# Altium PCB 婴儿监测系统.PcbDoc
Units mil, origin at the board's own origin, x right, y up, seen from the top; angles counter-clockwise.
Board outline 1968.5 x 3740.16 mil, 2 copper layers (Top Layer, Bottom Layer); 20 components, 42 nets, 149 pads, 0 vias.
Unrouted connection lines stored in the file: 2.
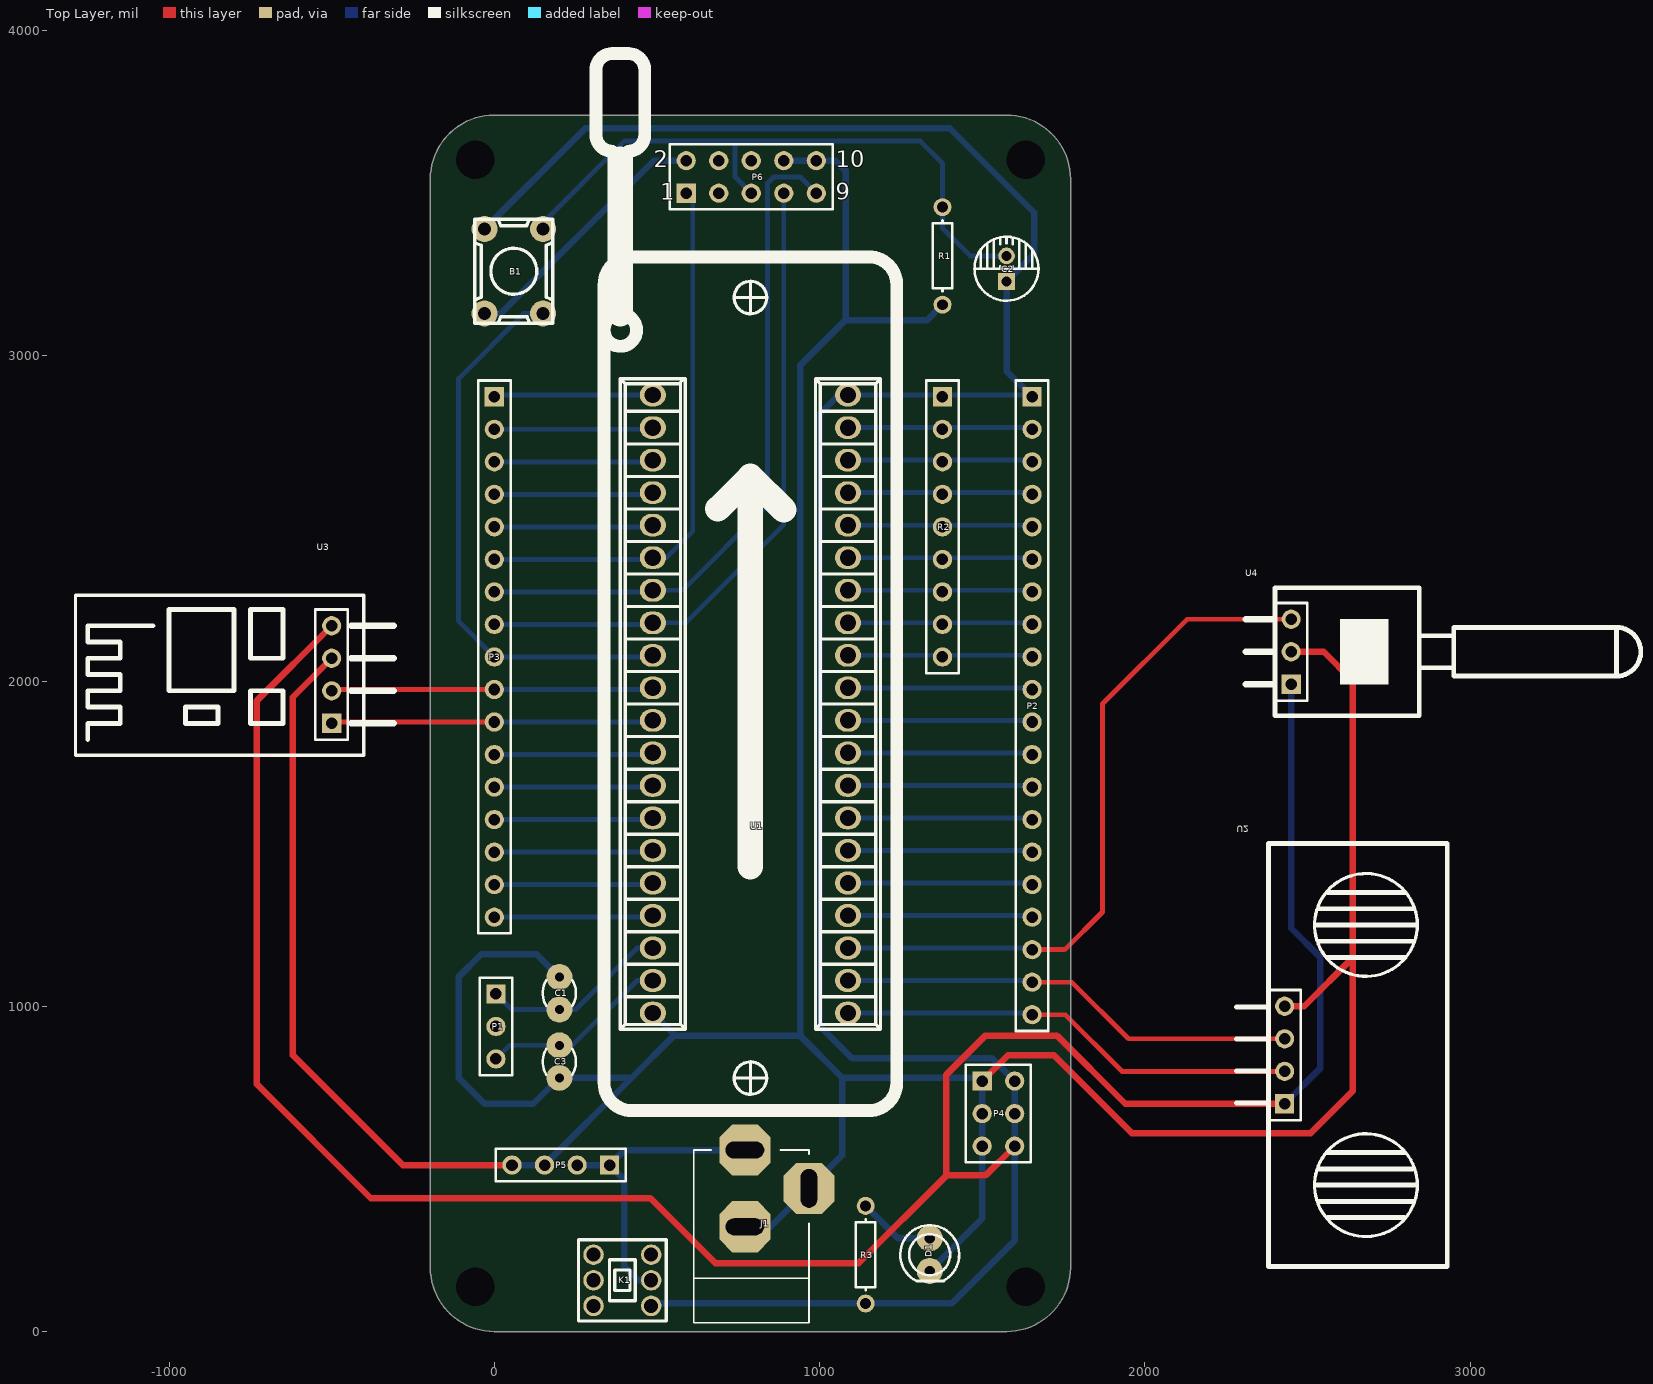
[diagram p0: Top Layer view]
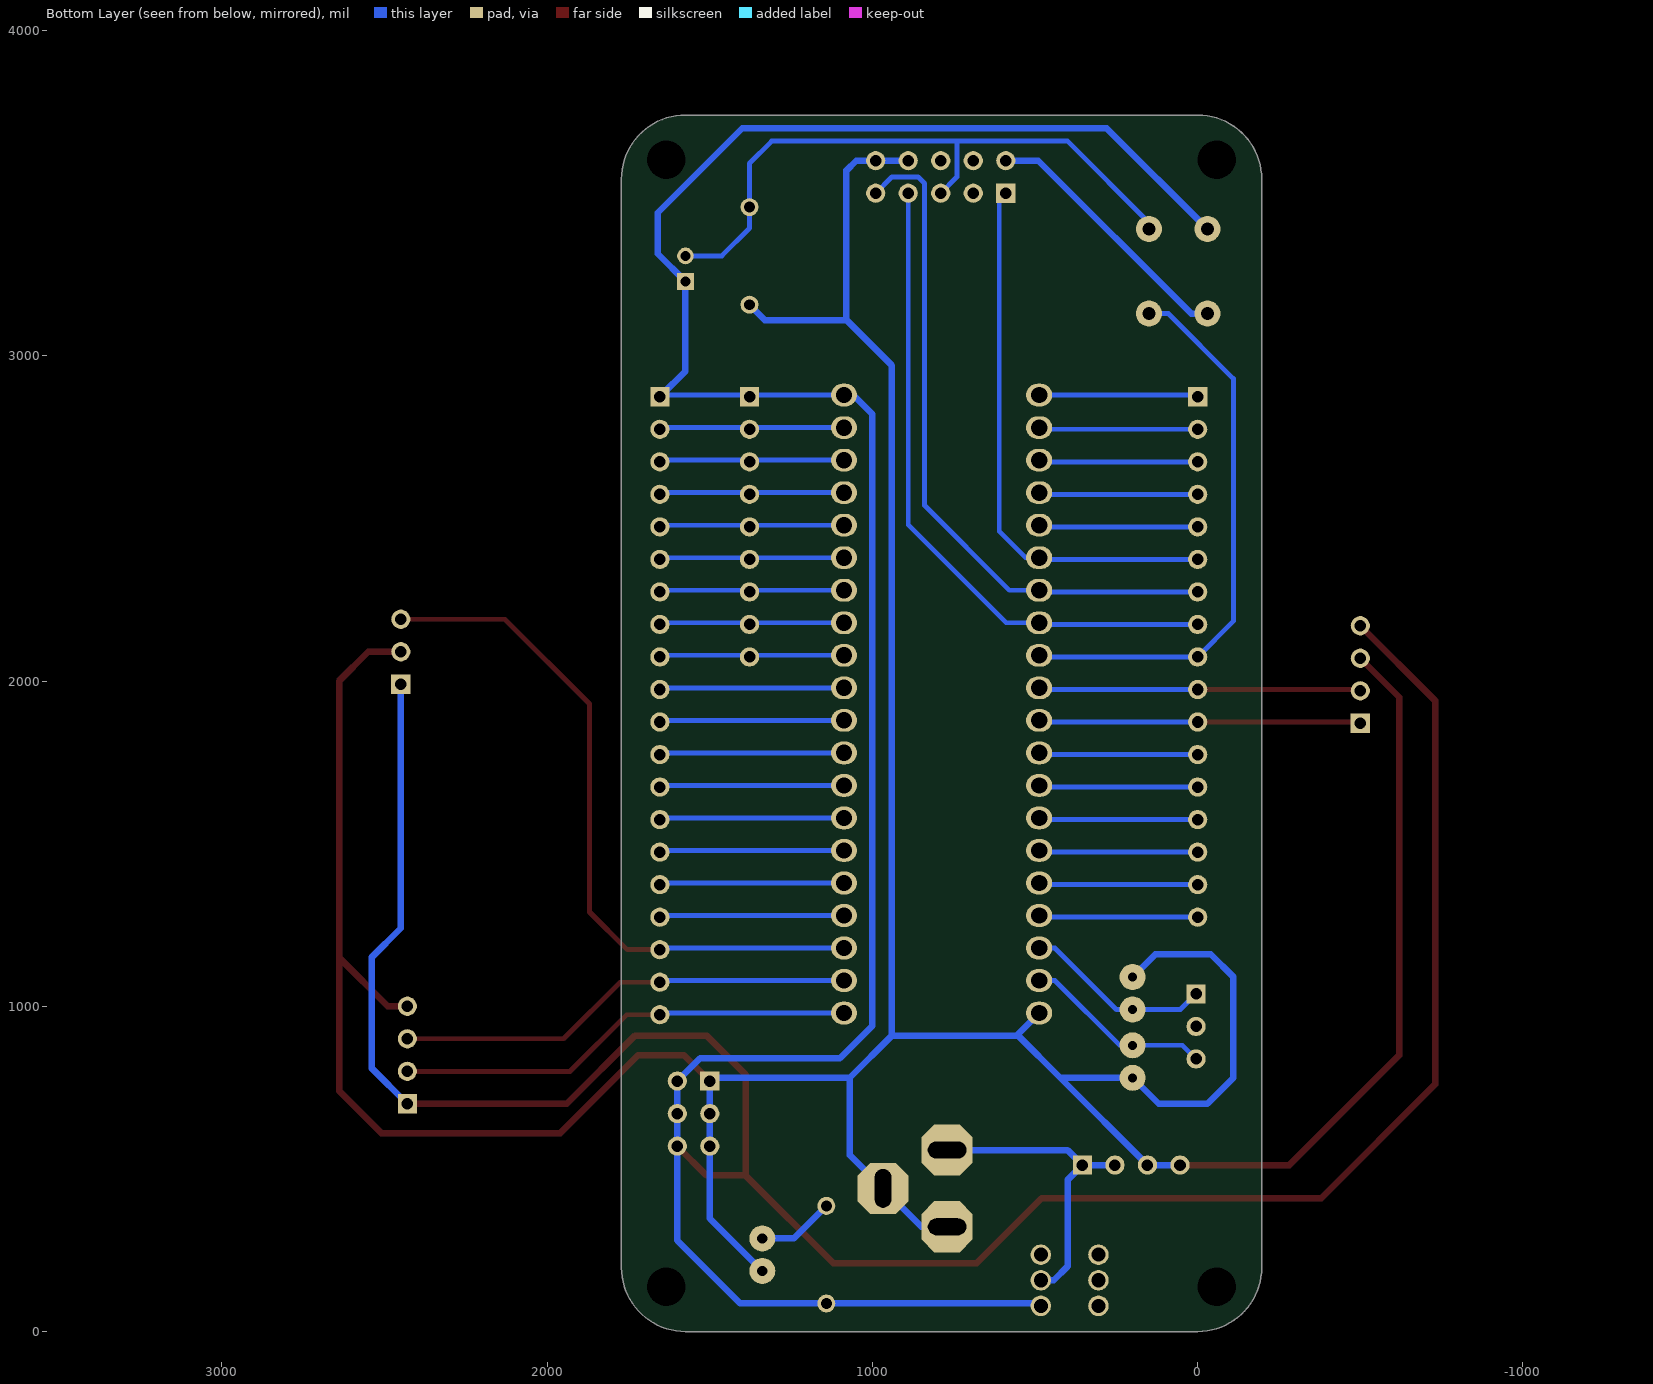
[diagram p1: Bottom Layer view, seen from below]

## Layer stack, top to bottom
Top Solder: solder mask 0.4, Solder Resist, Dk 3.5
Top Layer: signal copper 1.4
Dielectric 1: dielectric 12.6, FR-4, Dk 4.8
Bottom Layer: signal copper 1.4
Bottom Solder: solder mask 0.4, Solder Resist, Dk 3.5

## Board outline
-196.85,196.85 -196.85,3543.31 cw(c0,3543.31) 0,3740.16 1574.8,3740.16 cw(c1574.8,3543.31) 1771.65,3543.31 1771.65,196.85 cw(c1574.8,196.85) 1574.8,0 0,0 cw(c0,196.85)

## Design rules (kind name [scope] priority, off if disabled: settings)
Clearance Polygon_All [InPolygon vs InNetClass('All Nets')] p1: gap=15
Clearance Keepoutlayer [(InLayerClass('Signal Layers')) vs (OnLayer('Keep-Out Layer'))] p2: gap=12
Clearance [All] p3: gap=6
ComponentClearance [All] p1: gap=0 collisioncheckmode=3 verticalgap=0 showdistances=FALSE
PolygonConnect [All] p1: connectstyle=Relief reliefconductorwidth=10 reliefentries=4 polygonreliefangle="90 Angle" airgapwidth=10
RoutingVias [All] p1: holewidth=12 width=24 viastyle="Through Hole" minholewidth=12 minwidth=24 maxholewidth=12 maxwidth=24
SolderMaskExpansion [All] p1: expansion=4
Width Power_width [InNetClass('Power')] p1: maxlimit=100 minlimit=6 preferedwidth=40
Width Signal_width [All] p2: maxlimit=20 minlimit=15 preferedwidth=15
29 further rules are at their usual default settings.

## Components (designator, comment, footprint, x,y, rotation, side; value= is the part's Value field where it differs from the comment)
B1 "Button" BUTTON -30,3330 r270 top
C1 "Cap" C-RAD 200,1040 r270 top
C2 "10uF" C-RB-5.0 1574.8,3228.35 r90 top
C3 "Cap" C-RAD 200,830 r90 top
D1 "LED0" LED_A2 1338.58,236.22 r90 top
J1 "PWR2.5" kld-DC(2.5) 787.4,433.07 r90 top
K1 "自锁开关" SW-TH_6PIN-L5.80-W5.80-BL 393.7,157.48 r90 top
P1 "Header 3" HDR1X3 5,1038 r270 top
P2 "Header 20" HDR1X20 1653.54,2874.02 r270 top
P3 "Header 17" HDR1X17 0,2874.02 r270 top
P4 "Header 3X2" HDR2X3 1500,770 r270 top
P5 "Header 4" HDR1X4 354.33,511.81 r180 top
P6 "Header 5X2" HDR2X5 590,3500 r0 top
R1 "Res1" AXIAL-0.3 1377.95,3307.09 r90 top
R2 "Res Pack4_1" HDR1X9 1377.95,2874.02 r270 top
R3 "Res1" AXIAL-0.3 1141.73,236.22 r90 top
U1 "STC89C52" "DIP-40 (fan)" 787.4,1929.13 r0 top
U2 "M-HC-SR04" M-HC-SR04 2430,850 r90 top
U3 "HC-05" HC-04 -500,2020 r90 top
U4 "M-ZD" M-ZD 2450,2090 r270 top

## Footprints (in the part's own frame and the unit in brackets; to place one, negate y for a bottom-side part, rotate by r counter-clockwise, add the part's x,y. Pads: shape width x height; smd on the part's side, far side on the other; paste and mask are expansions set on the pad)
AXIAL-0.3 [mm] "Axial Device, Thru-Hole; 2 Leads; 0.3 in Pin Spacing"
  round 1.4 hole 0.85: 1(-3.81,0) 2(3.81,0)
  silkscreen extent -2.77,-0.76 2.77,0.76
BUTTON [mil] "微动开关"
  round 80 hole 40: 1(-60,180) 1(200,180) 2(-60,0) 2(200,0)
  silkscreen extent -90,-31 230,210
C-RAD [mil] "瓷片电容"
  round 80 hole 27.56: 1(-50,0) 2(50,0)
  silkscreen extent -40,-51 39,51
C-RB-5.0 [mm] "直径5.0mm/脚间距2.0mm"
  rect 1.3x1.3 hole 0.8: 1(0,0)
  round 1.3 hole 0.8: 2(2,0)
  silkscreen extent -1.5,-2.5 3.5,2.5
"DIP-40 (fan)" [mil]
  oval 80x70 hole 50: 1(-300,950) 2(-300,850) 3(-300,750) 4(-300,650) 5(-300,550) 6(-300,450) 7(-300,350) 8(-300,250) 9(-300,150) 10(-300,50) 11(-300,-50) 12(-300,-150) 13(-300,-250) 14(-300,-350) 15(-300,-450) 16(-300,-550) 17(-300,-650) 18(-300,-750) 19(-300,-850) 20(-300,-950) 21(300,-950) 22(300,-850) 23(300,-750) 24(300,-650) 25(300,-550) 26(300,-450) 27(300,-350) 28(300,-250) 29(300,-150) 30(300,-50) 31(300,50) 32(300,150) 33(300,250) 34(300,350) 35(300,450) 36(300,550) 37(300,650) 38(300,750) 39(300,850) 40(300,950)
  silkscreen extent -475,-1250 450,2000
HC-04 [mm]
  rect 1.5x1.5 hole 0.9: 1(-3.81,0)
  round 1.5 hole 0.9: 2(-1.27,0) 3(1.27,0) 4(3.81,0)
  silkscreen extent -6.31,-4.83 6.19,20
HDR1X3 [mm] "Connector; Header; 3 Position"
  rect 1.5x1.5 hole 0.9: 1(0,0)
  round 1.5 hole 0.9: 2(2.54,0) 3(5.08,0)
  silkscreen extent -1.27,-1.27 6.35,1.27
HDR1X4 [mm] "Connector; Header; 4 Position"
  rect 1.5x1.5 hole 0.9: 1(0,0)
  round 1.5 hole 0.9: 2(2.54,0) 3(5.08,0) 4(7.62,0)
  silkscreen extent -1.27,-1.27 8.89,1.27
HDR1X9 [mm] "Connector; Header; 9 Position"
  rect 1.5x1.5 hole 0.9: 1(0,0)
  round 1.5 hole 0.9: 2(2.54,0) 3(5.08,0) 4(7.62,0) 5(10.16,0) 6(12.7,0) 7(15.24,0) 8(17.78,0) 9(20.32,0)
  silkscreen extent -1.27,-1.27 21.59,1.27
HDR1X17 [mm] "Connector; Header; 17 Position"
  rect 1.5x1.5 hole 0.9: 1(0,0)
  round 1.5 hole 0.9: 2(2.54,0) 3(5.08,0) 4(7.62,0) 5(10.16,0) 6(12.7,0) 7(15.24,0) 8(17.78,0) 9(20.32,0) 10(22.86,0) 11(25.4,0) 12(27.94,0) 13(30.48,0) 14(33.02,0) 15(35.56,0) 16(38.1,0) 17(40.64,0)
  silkscreen extent -1.27,-1.27 41.91,1.27
HDR1X20 [mm] "Connector; Header; 20 Position"
  rect 1.5x1.5 hole 0.9: 1(0,0)
  round 1.5 hole 0.9: 2(2.54,0) 3(5.08,0) 4(7.62,0) 5(10.16,0) 6(12.7,0) 7(15.24,0) 8(17.78,0) 9(20.32,0) 10(22.86,0) 11(25.4,0) 12(27.94,0) 13(30.48,0) 14(33.02,0) 15(35.56,0) 16(38.1,0) 17(40.64,0) 18(43.18,0) 19(45.72,0) 20(48.26,0)
  silkscreen extent -1.27,-1.27 49.53,1.27
HDR2X3 [mm] "Connector; Header; 3x2 Position"
  rect 1.5x1.5 hole 0.9: 1(0,0)
  round 1.5 hole 0.9: 2(0,2.54) 3(2.54,0) 4(2.54,2.54) 5(5.08,0) 6(5.08,2.54)
  silkscreen extent -1.27,-1.27 6.35,3.81
HDR2X5 [mm] "Connector; Header; 5x2 Position"
  rect 1.5x1.5 hole 0.9: 1(0,0)
  round 1.5 hole 0.9: 2(0,2.54) 3(2.54,0) 4(2.54,2.54) 5(5.08,0) 6(5.08,2.54) 7(7.62,0) 8(7.62,2.54) 9(10.16,0) 10(10.16,2.54)
  silkscreen extent -1.27,-1.27 11.43,3.81
kld-DC(2.5) [mm]
  oct 4x4 hole 1.3 slot 3 at 90 deg: 1(3.175,0.432) 2(-2.819,0.432)
  oct 4x4 hole 1.3 slot 3 at 0 deg: 3(0.178,-4.572)
  silkscreen extent -10.31,-4.57 3.18,4.42
LED_A2 [mil] "直径3MM二极管"
  round 80 hole 31.5: 1(50,0) 2(-50,0)
  silkscreen extent -81,-91 90,91
M-HC-SR04 [mm]
  rect 1.5x1.5 hole 0.9: 1(-3.81,0)
  round 1.5 hole 0.9: 2(-1.27,0) 3(1.27,0) 4(3.81,0)
  silkscreen extent -16.51,-12.7 16.51,3.75
M-ZD [mm]
  rect 1.5x1.5 hole 0.9: 1(2.54,0)
  round 1.5 hole 0.9: 2(0,0) 3(-2.54,0)
  silkscreen extent -5,-3.56 5,27.3
SW-TH_6PIN-L5.80-W5.80-BL [mm]
  round 1.6 hole 1.1: 1(-2,-2.25) 2(0,-2.25) 3(2,-2.25) 4(-2,2.25) 5(0,2.25) 6(2,2.25)
  silkscreen extent -3.17,-3.43 3.18,3.43

## Part data
C1 C3: "无极性电容"
C2: library part "Cap Pol2", "有极性插件电容"
D1: "发光二极管"
J1: "Low Voltage Power Supply Connector"
K1: library part 双档拨动开关, "双档拨动开关"
P1: "Header, 3-Pin"
P2: "Header, 20-Pin"
P3: "Header, 17-Pin"
P4: "Header, 3-Pin, Dual row"
P5: "Header, 4-Pin"
P6: "Header, 5-Pin, Dual row"
R1 R3: "贴片电阻"
R2: "Isolated Resistor Network"
U1: "51系列单片机"
U2: "超声波模块"
U3: "蓝牙模块"
U4: library part M-zhendong, "MIC声音模块"

## Free pads (board coordinates)
  oval 59.06x70.87 hole 118.11: 0(-59.06,137.8) 0(1633.86,3602.36)
  oval 70.87x59.06 hole 118.11: 0(-59.06,3602.36) 0(1633.86,137.8)

## Nets (pads, with @x,y where several pads share a name; then routed paths per layer and width w, separated by ;. In a path a pad name is that pad's centre, name@x,y a point inside that pad or via, vN(x,y) a via of type N, cw(c..) or ccw(c..) an arc to the next point about the centre after c; other vN are vias at no path point)
+5V: B1.2 C2.1 K1.1 P2.1 P4.2 P4.4 P4.6 P6.2 R2.1 R3.1 U1.40 U2.1 U3.4 U4.1 | length 15360.8
  Top Layer w20: U3.4 -730,1940 -730,760 -380,410 480,410 680,210 1120,210 1390,480 ; P4.6 1510,480 1390,480 ; U2.1 1940,700 1730,910 1510,910 1390,790 1390,480
  Bottom Layer w15: U1.40 P2.1@1648.43,2879.13
  Bottom Layer w20: B1.2@-30,3130 20,3130 490,3600 P6.2 ; B1.2@-30,3390 280,3700 1400,3700 1660,3440 1660,3313.54 C2.1 1574.8,2952.76 1648.43,2879.13 P2.1 ; K1.1 489.76,86.22 R3.1 1406.22,86.22 1600,280 P4.6 P4.4 P4.2 1530,840 1100,840 1000,940 1000,2820 1059.13,2879.13 U1.40 ; U2.1 2540,810 2540,1150 2450,1240 U4.1
ALE: P2.11 U1.30 | length 568.3
  Bottom Layer w15: U1.30 1648.43,1879.13 P2.11
EA: P2.10 U1.31 | length 568.3
  Bottom Layer w15: U1.31 1648.43,1979.13 P2.10
GND: C1.1 C3.1 D1.2 J1.2 J1.3 P4.1 P4.3 P4.5 P5.3 P5.4 P6.8 P6.10 R1.1 U1.20 U2.4 U3.3 U4.2 | length 12728.2
  Top Layer w20: U3.3 -620,1950 -620,850 -281.81,511.81 P5.4 ; P4.1 1580,850 1720,850 1960,610 2510,610 2640,740 2640,1150 ; U2.4 2490,1000 2640,1150 ; U4.2 2550,2090 2640,2000 2640,1150
  Bottom Layer w20: P5.4 P5.3 422.52,780 ; C1.1 130,1160 -40,1160 -110,1090 -110,780 -30,700 120,700 C3.1 422.52,780 ; U1.20 552.52,914.02 552.52,910 ; J1.2 849.4,322.07 J1.3 1070,542.67 1070,780 ; P6.8 P6.10 1050,3600 1080,3570 1080,3110 ; D1.2 1500,347.64 P4.5 P4.3 P4.1 1490,780 1070,780 ; R1.1 1330.87,3110 1080,3110 ; 422.52,780 552.52,910 ; 552.52,910 940,910 ; 940,910 1070,780 ; 940,910 940,2970 1080,3110
NetD1_1: D1.1 R3.2 | length 238.3
  Bottom Layer w20: R3.2 1241.73,286.22 D1.1
P0.0: P2.2 R2.2 U1.39 | length 568.3
  Bottom Layer w15: U1.39 1648.43,2779.13 P2.2
P0.1: P2.3 R2.3 U1.38 | length 568.3
  Bottom Layer w15: U1.38 1648.43,2679.13 P2.3
P0.2: P2.4 R2.4 U1.37 | length 568.3
  Bottom Layer w15: U1.37 1648.43,2579.13 P2.4
P0.3: P2.5 R2.5 U1.36 | length 561
  Bottom Layer w15: U1.36 P2.5@1648.43,2479.13
P0.4: P2.6 R2.6 U1.35 | length 568.3
  Bottom Layer w15: U1.35 1648.43,2379.13 P2.6
P0.5: P2.7 R2.7 U1.34 | length 568.3
  Bottom Layer w15: U1.34 1648.43,2279.13 P2.7
P0.6: P2.8 R2.8 U1.33 | length 568.3
  Bottom Layer w15: U1.33 1648.43,2179.13 P2.8
P0.7: P2.9 R2.9 U1.32 | length 568.3
  Bottom Layer w15: U1.32 1648.43,2079.13 P2.9
P1.0: P3.1 U1.1 | length 482.3
  Bottom Layer w15: P3.1@5.12,2879.13 U1.1
P1.1: P3.2 U1.2 | length 489.5
  Bottom Layer w15: P3.2 482.28,2774.02 U1.2
P1.2: P3.3 U1.3 | length 489.5
  Bottom Layer w15: P3.3 482.28,2674.02 U1.3
P1.3: P3.4 U1.4 | length 489.5
  Bottom Layer w15: P3.4 482.28,2574.02 U1.4
P1.4: P3.5 U1.5 | length 489.5
  Bottom Layer w15: P3.5 482.28,2474.02 U1.5
P1.5: P3.6 P6.1 U1.6 | length 1693.9
  Bottom Layer w15: P3.6 482.28,2374.02 U1.6 529.13,2379.13 610,2460 610,3480 P6.1
P1.6: P3.7 P6.9 U1.7 | length 2119.2
  Bottom Layer w15: P3.7 482.28,2274.02 U1.7 579.13,2279.13 840,2540 840,3530 860,3550 940,3550 P6.9
P1.7: P3.8 P6.7 U1.8 | length 2036.7
  Bottom Layer w15: P3.8 482.28,2174.02 U1.8 589.13,2179.13 890,2480 P6.7
P2.0: P2.20 U1.21 U2.2 | length 1416.8
  Top Layer w15: P2.20 1755.98,974.02 1930,800 U2.2
  Bottom Layer w15: U1.21 1648.43,979.13 P2.20
P2.1: P2.19 U1.22 U2.3 | length 1416.8
  Top Layer w15: P2.19 1775.98,1074.02 1950,900 U2.3
  Bottom Layer w15: U1.22 1648.43,1079.13 P2.19
P2.2: P2.18 U1.23 U4.3 | length 2160.5
  Top Layer w15: P2.18 1754.02,1174.02 1870,1290 1870,1930 2130,2190 U4.3
  Bottom Layer w15: U1.23 1648.43,1179.13 P2.18
P2.3: P2.17 U1.24 | length 568.3
  Bottom Layer w15: U1.24 1648.43,1279.13 P2.17
P2.4: P2.16 U1.25 | length 568.3
  Bottom Layer w15: U1.25 1648.43,1379.13 P2.16
P2.5: P2.15 U1.26 | length 568.3
  Bottom Layer w15: U1.26 1648.43,1479.13 P2.15
P2.6: P2.14 U1.27 | length 568.3
  Bottom Layer w15: U1.27 1648.43,1579.13 P2.14
P2.7: P2.13 U1.28 | length 568.3
  Bottom Layer w15: U1.28 1648.43,1679.13 P2.13
P3.2: P3.12 U1.12 | length 489.5
  Bottom Layer w15: P3.12 482.28,1774.02 U1.12
P3.3: P3.13 U1.13 | length 489.5
  Bottom Layer w15: P3.13 482.28,1674.02 U1.13
P3.4: P3.14 U1.14 | length 489.5
  Bottom Layer w15: P3.14 482.28,1574.02 U1.14
P3.5: P3.15 U1.15 | length 489.5
  Bottom Layer w15: P3.15 482.28,1474.02 U1.15
P3.6: P3.16 U1.16 | length 489.5
  Bottom Layer w15: P3.16 482.28,1374.02 U1.16
P3.7: P3.17 U1.17 | length 489.5
  Bottom Layer w15: P3.17 482.28,1274.02 U1.17
PSEN: P2.12 U1.29 | length 568.3
  Bottom Layer w15: U1.29 1648.43,1779.13 P2.12
RST: B1.1 C2.2 P3.9 P6.5 R1.2 U1.9 | length 3719.1
  Bottom Layer w15: B1.1@150,3130 90,3130 -110,2930 -110,2184.02 P3.9 U1.9@482.28,2074.02 ; B1.1@150,3390 150,3410 400,3660 740,3660 ; P6.5 740,3550 740,3660 ; C2.2 1462.91,3307.09 1377.95,3392.05 R1.2 1377.95,3592.05 1310,3660 740,3660
RX: P3.10 U1.10 U3.2 | length 991.2
  Top Layer w15: U3.2 -495.98,1974.02 P3.10
  Bottom Layer w15: P3.10 482.28,1974.02 U1.10
TX: P3.11 U1.11 U3.1 | length 991.2
  Top Layer w15: U3.1 -495.98,1874.02 P3.11
  Bottom Layer w15: P3.11 482.28,1874.02 U1.11
VCC: J1.1 K1.2 P5.1 P5.2 | length 965.9
  Bottom Layer w20: P5.2 P5.1 ; K1.2 442.52,157.48 400,200 400,466.14 P5.1 ; J1.1 400.59,558.07 P5.1
XTAL1: C3.2 P1.3 U1.19 | length 582.3
  Bottom Layer w15: P1.3 47,880 C3.2 240,880 439.13,1079.13 U1.19
XTAL2: C1.2 P1.1 U1.18 | length 580.6
  Bottom Layer w15: P1.1 53,990 C1.2 250,990 439.13,1179.13 U1.18
pads on no net: K1.3 K1.4 K1.5 K1.6 P1.2 P6.3 P6.4 P6.6

## Text inside footprints (layer, text, board x,y; h text height)
P6: Top Overlay "10" at 1050,3580 h50; Top Overlay "9" at 1050,3480 h50; Top Overlay "1" at 510,3480 h50; Top Overlay "2" at 490,3580 h50